# EAGLE board CzujnikWilgotnosciGleby_Rafal.Brauner (EAGLE 9.6.2)
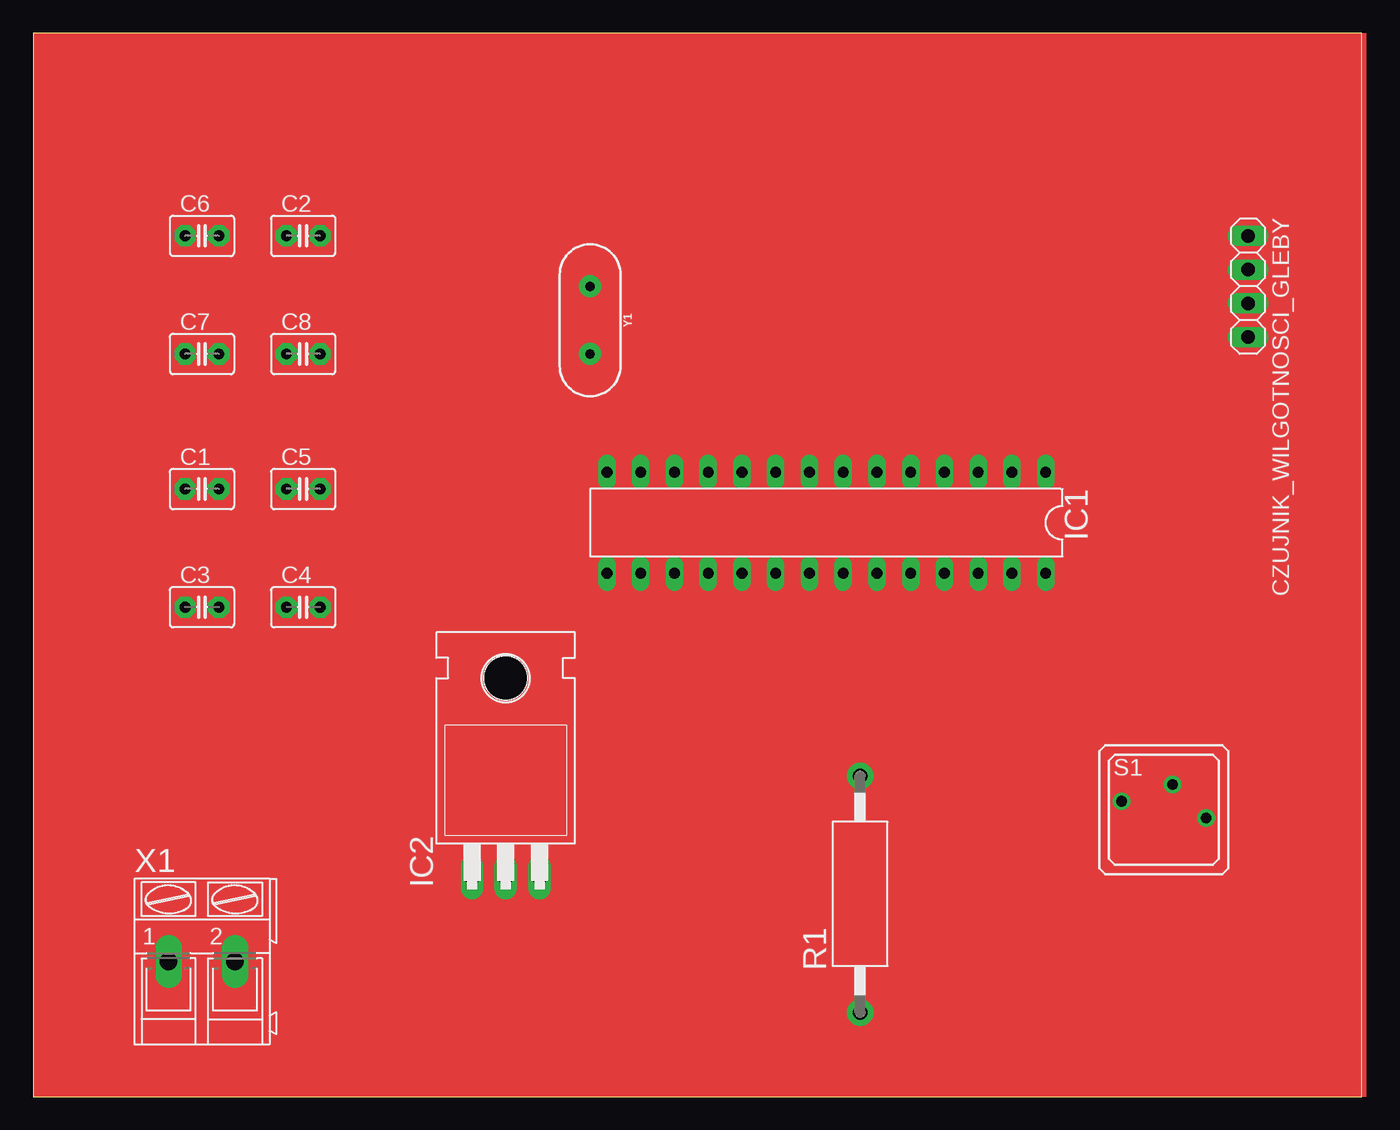
[diagram p0: board, top side]
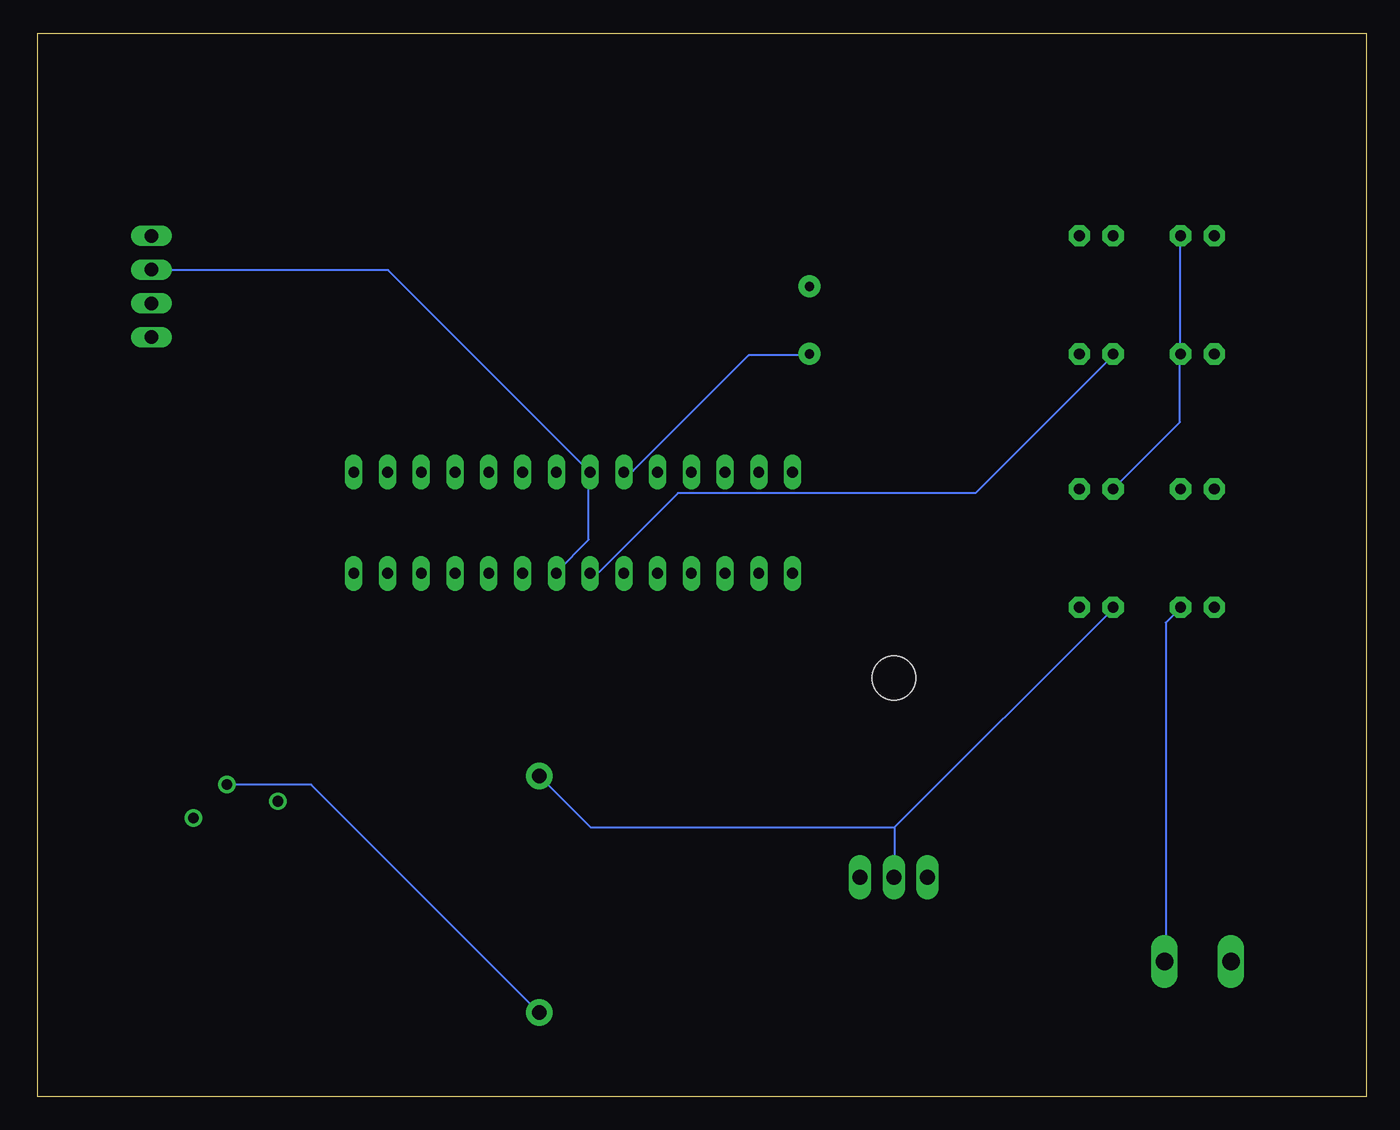
[diagram p1: board, bottom side, seen from below]

Size 100 x 80 mm. Coordinates in mm from the lower left corner, seen from the top.
Outline: 0,0 100,0 100,80 0,80 0,0
Copper layers (1*16): Top 0.035mm / dielectric 1.5mm / Bottom 0.035mm
Design rules "default": minimum track width 6mil, minimum drill 0.35mm, track to track 6mil, track to pad 6mil, pad to pad 6mil, via to via 6mil, smd to smd 6mil, copper to edge 40mil, drill to drill 6mil, minimum pad ring 10mil, minimum via ring 8mil, stop-mask expansion 4mil, vias tented up to drill 0mil, thermal gap 10mil

## Footprints (pad centres in the part's own frame; a part is rotated, then mirrored left to right if it is on the bottom)
C2.5-3 = drill 0.813 pad 1.6 octagon: 1 -1.27,0; 2 1.27,0
1X04 = drill 1.016 long: 1 -3.81,0; 2 -1.27,0; 3 1.27,0; 4 3.81,0
DIL28-3 = drill 0.813 long: 1 -16.51,-3.81; 2 -13.97,-3.81; 3 -11.43,-3.81; 4 -8.89,-3.81; 5 -6.35,-3.81; 6 -3.81,-3.81; 7 -1.27,-3.81; 8 1.27,-3.81; 9 3.81,-3.81; 10 6.35,-3.81; 11 8.89,-3.81; 12 11.43,-3.81; 13 13.97,-3.81; 14 16.51,-3.81; 15 16.51,3.81; 16 13.97,3.81; 17 11.43,3.81; 18 8.89,3.81; 19 6.35,3.81; 20 3.81,3.81; 21 1.27,3.81; 22 -1.27,3.81; 23 -3.81,3.81; 24 -6.35,3.81; 25 -8.89,3.81; 26 -11.43,3.81; 27 -13.97,3.81; 28 -16.51,3.81
TO220H = drill 1.118 long: 1 -2.54,-10.16; 2 0,-10.16; 3 2.54,-10.16 | hole 3.302: 0,4.826
AC01 = drill 1.1 pad 2: 1 -8.9,0; 2 8.9,0
RDT1034 = drill 0.8: A 3.175,-0.635; A1 -3.175,0.635; B 0.65,1.9
AK300/2 = drill 1.321 long: 1 -2.515,0; 2 2.489,0
HC49US = drill 0.7 pad 1.651: 1 -2.54,0; 2 2.54,0

## Placement (x,y rotation side)
C1  100nF  [C2.5-3]  12.7,45.72 0 top
C2  100nF  [C2.5-3]  20.32,64.77 0 top
C3  100nF  [C2.5-3]  12.7,36.83 0 top
C4  100nF  [C2.5-3]  20.32,36.83 0 top
C5  22nF  [C2.5-3]  20.32,45.72 0 top
C6  100nF  [C2.5-3]  12.7,64.77 0 top
C7  100nF  [C2.5-3]  12.7,55.88 0 top
C8  100nF  [C2.5-3]  20.32,55.88 0 top
CZUJNIK_WILGOTNOSCI_GLEBY  [1X04]  91.44,60.96 270 top
IC1  ATMEGA328-20P  [DIL28-3]  59.69,43.18 180 top
IC2  LM1117T(H)-5.0  [TO220H]  35.56,26.67 0 top
R1  100k  [AC01]  62.23,15.24 90 top
S1  RDT1034  [RDT1034]  85.09,21.59 0 top
X1  [AK300/2]  12.7,10.16 0 top
Y1  [HC49US]  41.91,58.42 270 top

## Library data of the parts
C1-C8 = capacitor-wima
CZUJNIK_WILGOTNOSCI_GLEBY = pinhead
IC1 = atmega328_Rafal.Brauner
IC2 = lm1117_10; MF: Texas Instruments; MPN: LM1117T-5.0; OC_FARNELL: 1215183; OC_NEWARK: 41K3491
R1 = resistor-power; OC_FARNELL: unknown; OC_NEWARK: unknown
S1 = switch
X1 = con-ptr500; OC_FARNELL: unknown; OC_NEWARK: unknown
Y1 = SparkFun-Clocks

## Nets
N$1: C3.1 IC2.3 X1.1
N$2: C4.1 C5.1 C6.2 C7.2 CZUJNIK_WILGOTNOSCI_GLEBY.1 IC1.7 IC1.20 IC2.2 R1.2
N$3: C1.1 C2.1 C3.2 C4.2 C5.2 C6.1 C7.1 C8.2 CZUJNIK_WILGOTNOSCI_GLEBY.2 IC1.8 IC1.22 IC2.1 X1.2
N$4: IC1.1 S1.A1
N$5: R1.1 S1.B
N$6: C1.2 IC1.9 Y1.2
N$7: C8.1 IC1.21
N$8: C2.2 IC1.10 Y1.1
N$12: CZUJNIK_WILGOTNOSCI_GLEBY.4 IC1.28

## Tracks (layer width: path | path; a pad name or v marks a point on that pad's centre or on a via)
N$1
  Top 0.152: 11.43,18.44 11.43,11.43 10.21,10.21 X1.1 | 11.43,18.44 C3.1 | 11.43,18.44 36.27,18.44 38.1,16.61 IC2.3
N$2
  Top 0.152: C5.1 C4.1 | CZUJNIK_WILGOTNOSCI_GLEBY.1 78.64,64.77 60.96,47.09 IC1.7 60.96,46.94 55.93,41.91 55.93,39.47 IC1.20 62.18,33.07 62.18,24.23 R1.2
  Bottom 0.152: C6.2 14.02,64.77 14.02,55.93 C7.2 14.02,55.78 14.02,50.75 C5.1 | 35.51,20.27 35.51,16.61 IC2.2 | 35.51,20.27 19.05,36.73 C4.1 | 35.51,20.27 58.37,20.27 62.18,24.08 R1.2
N$3
  Top 0.152: X1.2 21.49,16.46 32.92,16.46 IC2.1 | 21.64,45.41 21.64,36.88 C4.2 20.42,35.66 18.75,35.66 17.68,36.73 14.02,36.73 C3.2 13.87,36.88 13.87,43.28 C1.1 C7.1 11.43,63.7 | 21.64,45.41 21.64,45.72 C5.2 21.64,45.41 | 11.43,63.7 C6.1 | 11.43,63.7 14.48,63.7 15.54,64.77 C2.1 21.49,62.33 21.49,55.93 C8.2 | 21.64,45.41 56.24,45.41 57.76,46.94 58.37,46.94 IC1.8
  Bottom 0.152: IC1.22 60.96,39.47 58.52,41.91 58.52,46.94 IC1.8 73.61,62.18 91.44,62.18 CZUJNIK_WILGOTNOSCI_GLEBY.2 | X1.2 15.09,10.21 15.09,35.66 14.02,36.73 C3.2
N$4
  Top 0.152: S1.A1 81.84,22.25 81.84,31.7 75.29,38.25 75.29,46.02 76.2,46.94 IC1.1
N$5
  Bottom 0.152: S1.B 85.65,23.47 79.4,23.47 62.33,6.4 R1.1
N$6
  Top 0.152: C1.2 17.53,45.72 27.58,55.78 41.91,55.78 Y1.2
  Bottom 0.152: IC1.9 55.78,47.09 55.17,47.09 46.48,55.78 41.91,55.78 Y1.2
N$7
  Bottom 0.152: IC1.21 58.37,39.47 57.76,39.47 51.82,45.41 29.41,45.41 19.05,55.78 C8.1
N$8
  Top 0.152: IC1.10 53.34,49.53 Y1.1 38.1,64.77 C2.2
N$12
  Top 0.152: IC1.28 76.2,41.91 CZUJNIK_WILGOTNOSCI_GLEBY.4
(copper drawn outside any net)
  shapes: Top area x1